# Altium PCB DAQ_Board.PcbDoc
Units mm, origin at the board's own origin, x right, y up, seen from the top; angles counter-clockwise.
Board outline 59.94 x 40 mm, 2 copper layers (Top Layer, Bottom Layer); 41 components, 41 nets, 202 pads, 45 vias.
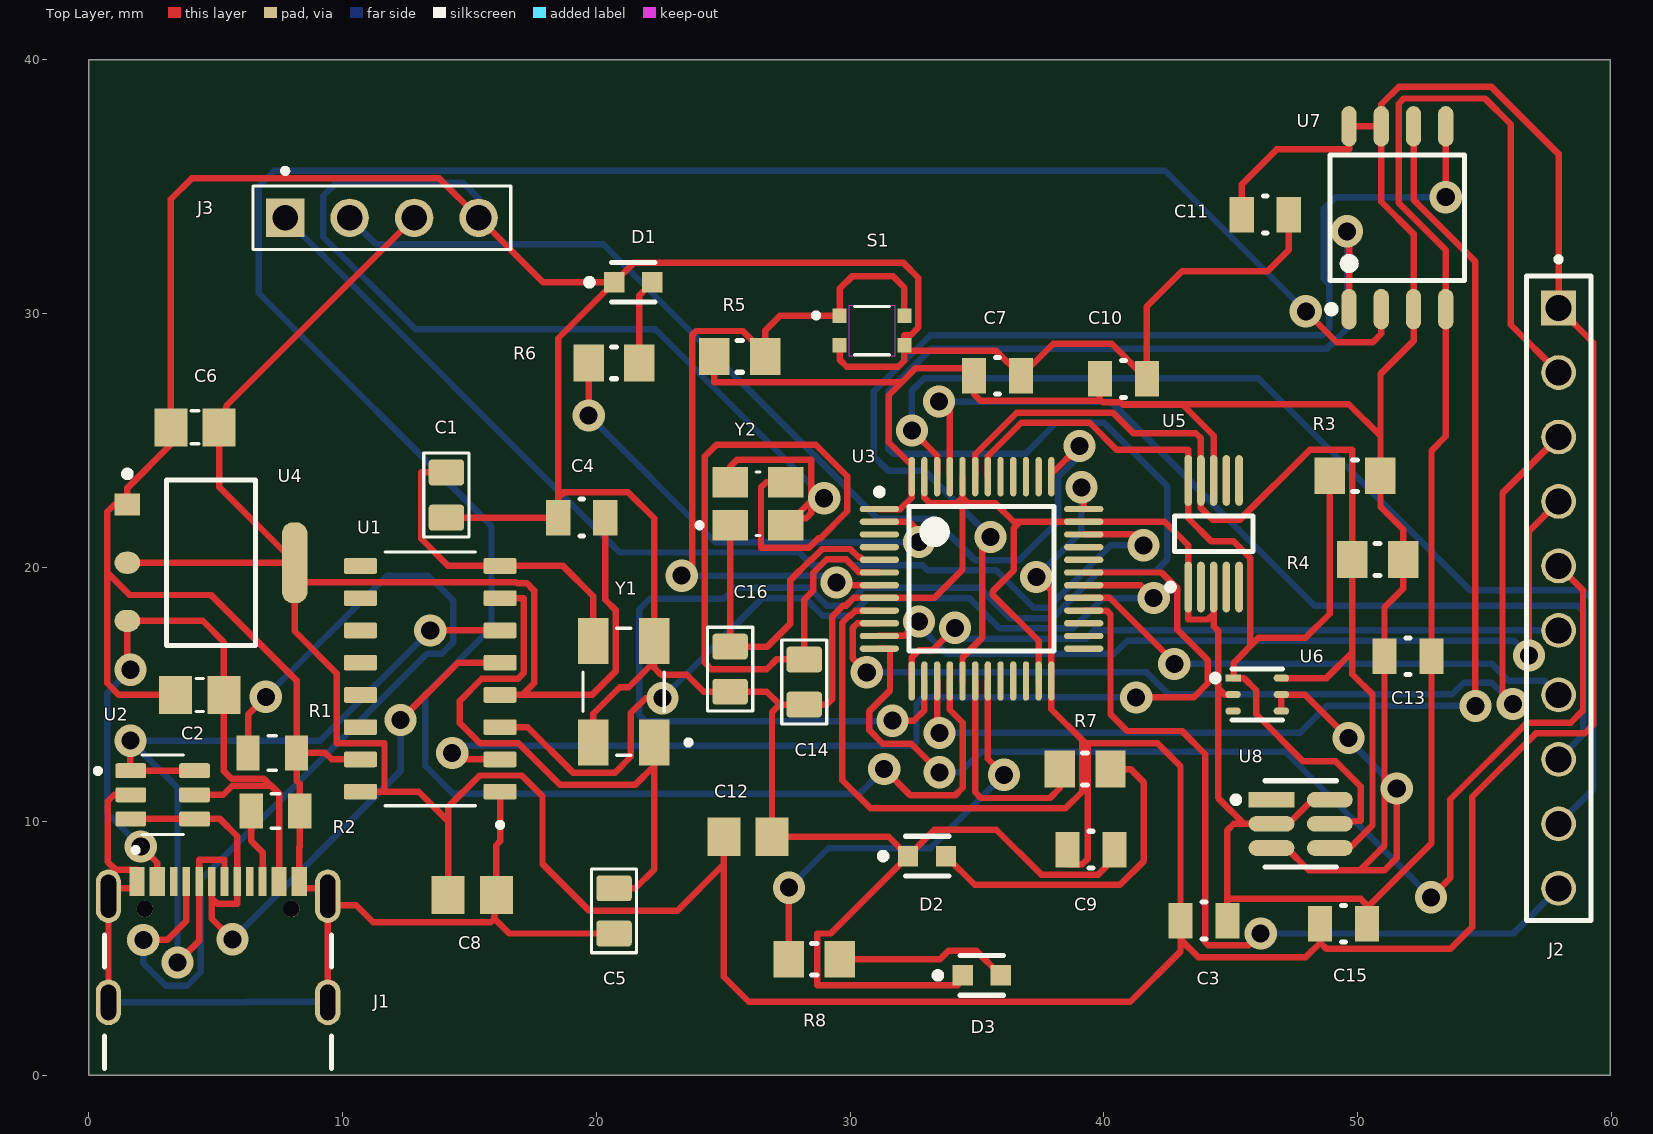
[diagram p0: Top Layer view]
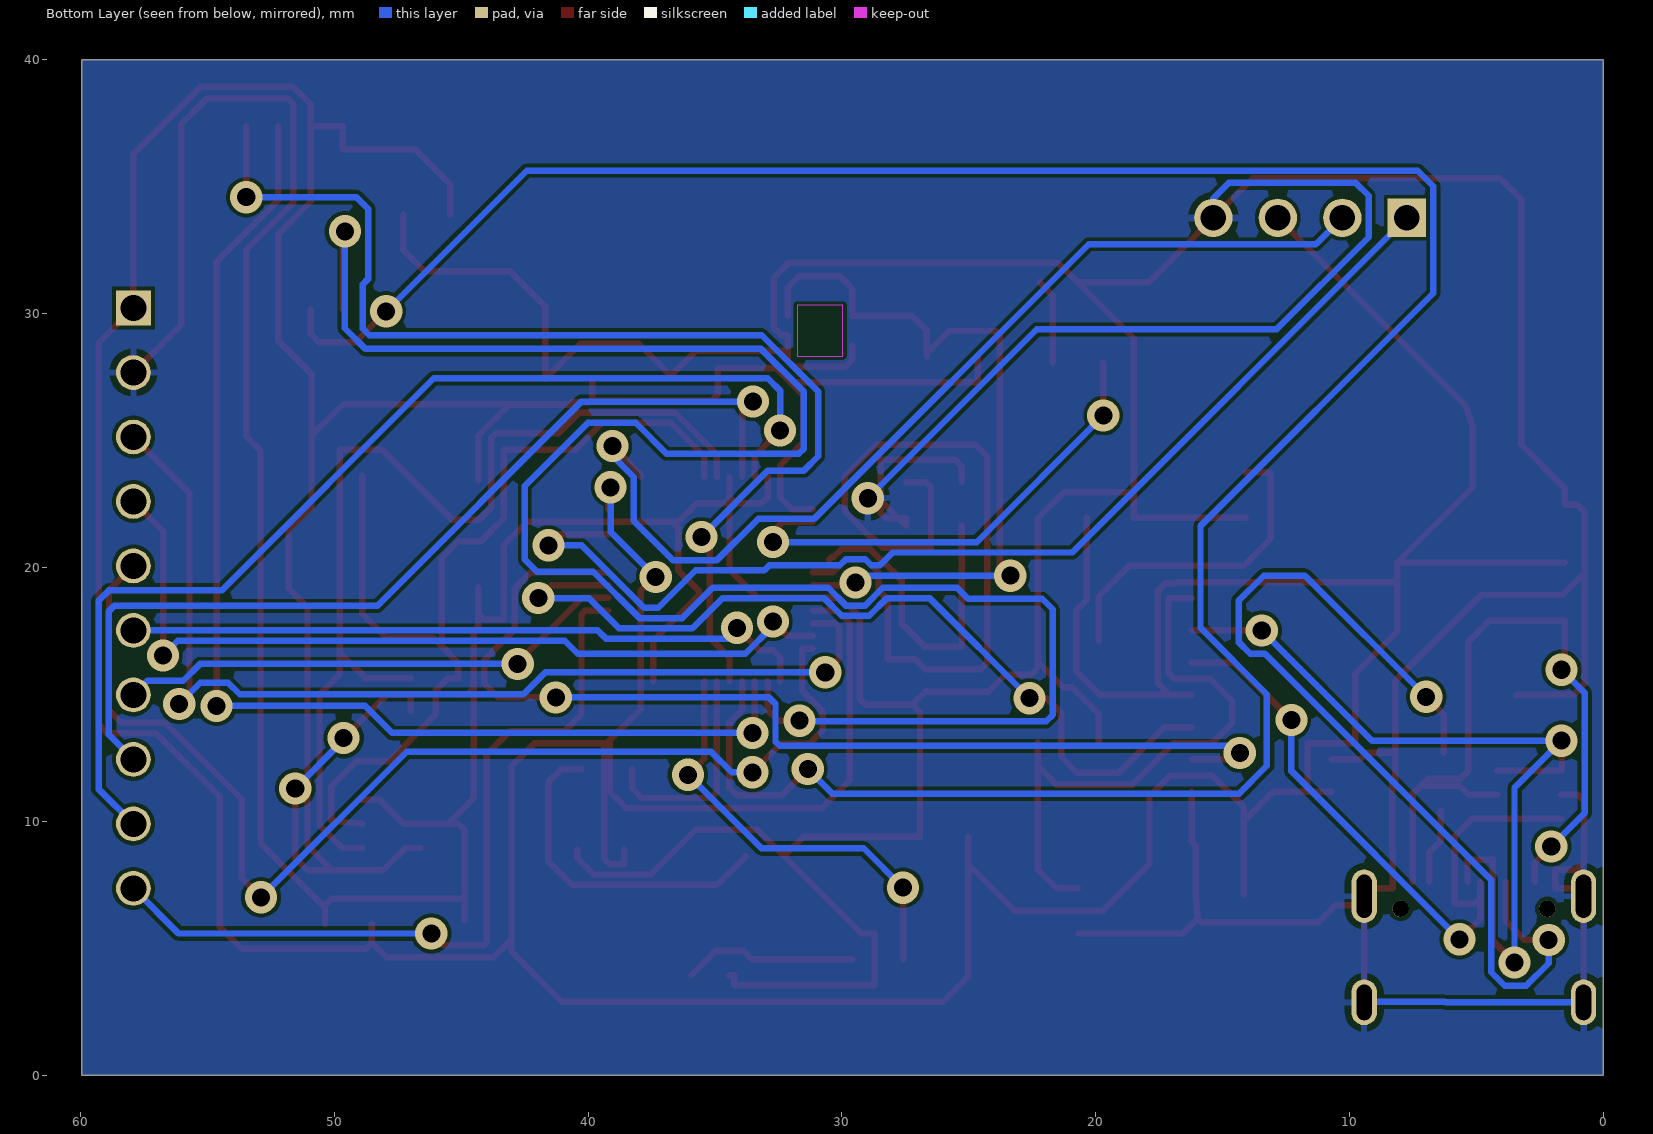
[diagram p1: Bottom Layer view, seen from below]
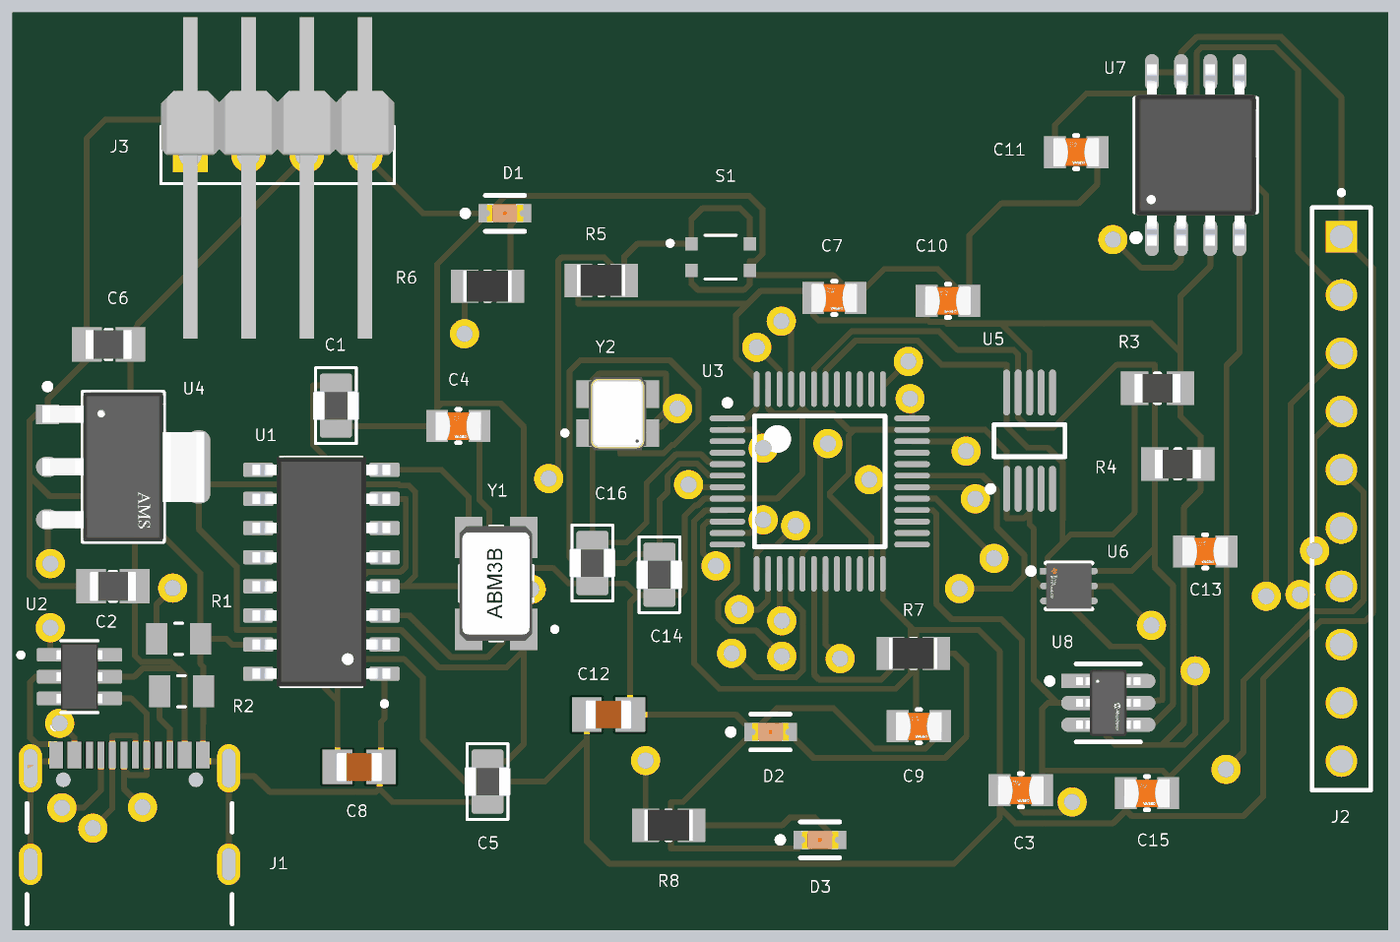
[diagram p2: 3D render of the assembled board from above, using the file's embedded part models]

## Layer stack, top to bottom
Top Solder: solder mask 0.0102, Solder Resist, Dk 3.5
Top Layer: signal copper 0.0356
Dielectric 1: dielectric 0.32, FR-4, Dk 4.8
Bottom Layer: signal copper 0.0356
Bottom Solder: solder mask 0.0102, Solder Resist, Dk 3.5

## Board outline
0,0 59.944,0 59.944,40.005 0,40.005

## Design rules (kind name [scope] priority, off if disabled: settings)
Clearance [All] p1: gap=0.15 ignorepadtopadclearanceinfootprint=TRUE
PolygonConnect [All] p1: connectstyle=Relief reliefconductorwidth=0.254 reliefentries=4 polygonreliefangle="90 Angle" airgapwidth=0.254
RoutingVias [All] p1: holewidth=0.711 width=1.27 viastyle="Through Hole" minholewidth=0.711 minwidth=1.27 maxholewidth=0.711 maxwidth=1.27
SolderMaskExpansion [All] p1: expansion=0 istentingtop=FALSE
SupplyNets "Schematic Supply Nets_2" [InNet('+5')] p1: voltage=0.000
SupplyNets "Schematic Supply Nets_1" [InNet('VCC')] p2: voltage=0.000
SupplyNets "Schematic Supply Nets" [InNet('GND')] p3: voltage=0.000
Width [All] p1: maxlimit=0.254 minlimit=0.254 preferedwidth=0.254
30 further rules are at their usual default settings.

## Components (designator, comment, footprint, x,y, rotation, side; value= is the part's Value field where it differs from the comment)
C1 "CERAMIC-22PF-50V-5%-NPO(0805)" C0805 14.097,22.86 r0 top
C2 "CC0805KKX5R7BB106" CAPC2012X70 4.379,14.986 r0 top
C3 "CC0805KRX7R9BB104" FP-CC0805-0_85-MFG 43.942,6.096 r0 top value="100 nF"
C4 "CC0805KRX7R9BB104" FP-CC0805-0_85-MFG 19.431,21.971 r0 top value="100 nF"
C5 "CERAMIC-22PF-50V-5%-NPO(0805)" C0805 20.701,6.477 r0 top
C6 "CC0805KKX5R7BB106" CAPC2012X70 4.191,25.527 r0 top
C7 "CC0805KRX7R9BB104" FP-CC0805-0_85-MFG 35.814,27.559 r0 top value="100 nF"
C8 "GRM21BR61A105KA01L" CAPC2012X135N 15.113,7.112 r0 top
C9 "CC0805KRX7R9BB104" FP-CC0805-0_85-MFG 39.497,8.89 r0 top value="100 nF"
C10 "CC0805KRX7R9BB104" FP-CC0805-0_85-MFG 40.767,27.432 r0 top value="100 nF"
C11 "CC0805KRX7R9BB104" FP-CC0805-0_85-MFG 46.355,33.909 r0 top value="100 nF"
C12 "GRM21BR61A105KA01L" CAPC2012X135N 25.974,9.398 r0 top
C13 "CC0805KRX7R9BB104" FP-CC0805-0_85-MFG 51.979,16.51 r0 top value="100 nF"
C14 "CERAMIC-22PF-50V-5%-NPO(0805)" C0805 28.194,15.494 r0 top
C15 "CC0805KRX7R9BB104" FP-CC0805-0_85-MFG 49.439,5.969 r0 top value="100 nF"
C16 "CERAMIC-22PF-50V-5%-NPO(0805)" C0805 25.273,16.002 r0 top
D1 "LTST-C191KRKT" FP-LTST-C191KRKT-MFG 21.463,31.242 r0 top
D2 "LTST-C191KRKT" FP-LTST-C191KRKT-MFG 33.032,8.636 r0 top
D3 "LTST-C191KRKT" FP-LTST-C191KRKT-MFG 35.191,3.937 r0 top
J1 "USB4105-GF-A" GCT_USB4105-GF-A 5.105,2.875 r0 top
J2 "MTSW-110-13-T-S-1000" SAMTEC_MTSW-110-13-T-S-1000 57.912,18.796 r90 top
J3 "826648-4" TE_826648-4 11.557,33.782 r0 top
R1 "RC0805FR-075K1L" RESC2012X60N 7.239,12.7 r0 top
R2 "RC0805FR-075K1L" RESC2012X60N 7.366,10.414 r0 top
R3 "RC0805FR-074K7L" YAGO-RC0805_M 49.895,23.622 r0 top
R4 "RC0805FR-074K7L" YAGO-RC0805_M 50.784,20.32 r0 top
R5 "RC0805FR-07100RL" RESC2013X60X35ML10T20 25.654,28.321 r0 top
R6 "RC0805FR-071KL" RESC2013X60X35ML10T20 20.701,28.067 r0 top
R7 "RC0805FR-071KL" RESC2013X60X35ML10T20 39.259,12.065 r0 top
R8 "RC0805FR-071KL" RESC2013X60X35ML10T20 28.591,4.572 r0 top
S1 "USLPT2819DT2TR" SW_USLPT2819DT2TR 30.861,29.337 r0 top
U1 "CH340G" SOIC127P600X180-16N 13.462,15.621 r180 top
U2 "USBLC6-2SC6" SOT95P280X145-6N 2.921,11.049 r0 top
U3 "STM32F103C8T6" STM-LQFP48_L 35.179,19.558 r0 top
U4 "AMS1117-3.3" FP-AMS1117-IPC_C 4.826,20.193 r0 top
U5 "ADS1115IDGST" TI-DGS10_M 44.323,21.336 r90 top
U6 "TMP117MAIDRVR" FP-DRV0006B-IPC_C 46.039,15.001 r0 top
U7 "W25Q32JVSSIQ" SOIC127P790X216-8N 51.562,33.782 r90 top
U8 "MCP4725A0T-E/CH" FP-C04-028-CHY-IPC_A 47.752,9.906 r0 top
Y1 "ABM3B-12.000MHZ-B2-T" XTAL_ABM3B-12.000MHZ-B2-T 21.082,15.113 r180 top
Y2 "C3E-8.000-18-3030-X-R" XTAL_C3E-8.000-18-3030-X-R 26.373,22.518 r0 top

## Footprints (in the part's own frame and the unit in brackets; to place one, negate y for a bottom-side part, rotate by r counter-clockwise, add the part's x,y. Pads: shape width x height; smd on the part's side, far side on the other; paste and mask are expansions set on the pad)
C0805 [mil]
  rrect25% 55x40 smd: 1(0,35) 2(0,-35)
  silkscreen extent -35,-65 35,65, body extent -39,-25 39,25, height 28
CAPC2012X70 [mm]
  rect 1.3x1.5 smd: 1(-0.95,0) 2(0.95,0)
  silkscreen extent -0.15,-0.65 0.15,0.65, body extent -1,-0.63 1,0.63, height 0.3
CAPC2012X135N [mm]
  rect 1.3x1.5 smd paste+0 mask+0.102: 1(-0.95,0) 2(0.95,0)
  body extent -1,-0.63 1,0.63, height 1.35
FP-AMS1117-IPC_C [mm]
  rect 1.004x0.872 smd paste+0 mask+0: 1(-3.295,2.29)
  rrect100% 1.004x0.872 smd paste+0 mask+0: 2(-3.295,0) 3(-3.295,-2.29)
  rrect87% 1.004x3.182 smd paste+0 mask+0: 4(3.295,0)
  silkscreen extent -3.42,-3.25 1.75,3.62, body extent -3.9,-3.35 3.9,3.35, height 0.25
FP-C04-028-CHY-IPC_A [mm]
  rect 1.805x0.618 smd paste+0 mask+0: 1(-1.15,0.95)
  rrect100% 1.805x0.618 smd paste+0 mask+0: 2(-1.15,0) 3(-1.15,-0.95) 4(1.15,-0.95) 5(1.15,0) 6(1.15,0.95)
  silkscreen extent -2.68,-1.7 1.4,1.7, body extent -2.55,-1.95 2.55,1.95, height 0.25
FP-CC0805-0_85-MFG [mm]
  rect 0.95x1.4 smd paste+0 mask+0: 1(-0.925,0) 2(0.925,0)
  silkscreen extent -0.07,-0.73 0.07,0.73, body extent -1.6,-1.05 1.6,1.05, height 0.25
FP-DRV0006B-IPC_C [mm]
  rect 0.611x0.292 smd paste+0 mask+0: 1(-0.951,0.65)
  rrect100% 0.611x0.292 smd paste+0 mask+0: 2(-0.951,0) 3(-0.951,-0.65) 4(0.951,-0.65) 5(0.951,0) 6(0.951,0.65)
  silkscreen extent -1.78,-1 1,1, body extent -1.36,-1.1 1.36,1.1, height 0.25
FP-LTST-C191KRKT-MFG [mm]
  rect 0.8x0.8 smd paste+0 mask+0: 1(-0.75,0) 2(0.75,0)
  silkscreen extent -1.86,-0.78 0.86,0.78, body extent -1.25,-0.55 1.25,0.55, height 0.25
GCT_USB4105-GF-A [mm]
  rect 0.6x1.15 smd mask+0.05: A1_B12(-3.2,4.755) A4_B9(-2.4,4.755) B1_A12(3.2,4.755) B4_A9(2.4,4.755)
  rect 0.3x1.15 smd mask+0.05: A5(-1.25,4.755) A6(-0.25,4.755) A7(0.25,4.755) A8(1.25,4.755) B5(1.75,4.755) B6(0.75,4.755) B7(-0.75,4.755) B8(-1.75,4.755)
  oval 1x2.1 hole 0.6 slot 1.7 at 90 deg: SH1(-4.32,4.18) SH2(4.32,4.18)
  oval 1x1.8 hole 0.6 slot 1.4 at 90 deg: SH3(-4.32,0) SH4(4.32,0)
  round 0.65 hole 0.65 unplated: ""(-2.89,3.68) ""(2.89,3.68)
  silkscreen extent -4.47,-2.6 4.47,6.1
RESC2012X60N [mm]
  rect 0.92x1.38 smd: 1(-0.955,0) 2(0.955,0)
  silkscreen extent -0.17,-0.68 0.17,0.68
RESC2013X60X35ML10T20 [mm] "Chip Resistor, 2-Leads, Body 2.1x1.35mm, IPC Low Density"
  rect 1.2x1.45 smd: 1(-1,0) 2(1,0)
  silkscreen extent -0.1,-0.62 0.1,0.62, body extent -1.05,-0.68 1.05,0.67, height 0.6
SAMTEC_MTSW-110-13-T-S-1000 [mm]
  rect 1.37x1.37 / inner round 1.37 / far side rect 1.37x1.37 hole 1.02: 01(11.43,0)
  round 1.37 hole 1.02: 02(8.89,0) 03(6.35,0) 04(3.81,0) 05(1.27,0) 06(-1.27,0) 07(-3.81,0) 08(-6.35,0) 09(-8.89,0) 10(-11.43,0)
  silkscreen extent -12.7,-1.27 13.45,1.27
SOIC127P600X180-16N [mm]
  rrect25% 1.31x0.62 smd: 1(-2.75,4.445) 2(-2.75,3.175) 3(-2.75,1.905) 4(-2.75,0.635) 5(-2.75,-0.635) 6(-2.75,-1.905) 7(-2.75,-3.175) 8(-2.75,-4.445) 9(2.75,-4.445) 10(2.75,-3.175) 11(2.75,-1.905) 12(2.75,-0.635) 13(2.75,0.635) 14(2.75,1.905) 15(2.75,3.175) 16(2.75,4.445)
  silkscreen extent -2.85,-5 1.78,5.85, body extent -3,-5 3,5, height 1.8
SOIC127P790X216-8N [mm]
  oval 1.6x0.6 smd: 1(-3.6,1.905) 2(-3.6,0.635) 3(-3.6,-0.635) 4(-3.6,-1.905) 5(3.6,-1.905) 6(3.6,-0.635) 7(3.6,0.635) 8(3.6,1.905)
  silkscreen extent -3.82,-2.65 2.47,2.82, body extent -3.95,-2.64 3.95,2.64, height 2.16
SOT95P280X145-6N [mm]
  rrect25% 1.21x0.59 smd: 1(-1.255,0.95) 2(-1.255,0) 3(-1.255,-0.95) 4(1.255,-0.95) 5(1.255,0) 6(1.255,0.95)
  silkscreen extent -2.65,-1.56 0.81,1.56, body extent -1.4,-1.46 1.4,1.46, height 0.4
STM-LQFP48_L [mm] "QFP, 48-Leads, Body 7x7mm, Pitch 0.5mm, IPC High Density"
  oval 1.55x0.25 smd: 1(-4.025,2.75) 2(-4.025,2.25) 3(-4.025,1.75) 4(-4.025,1.25) 5(-4.025,0.75) 6(-4.025,0.25) 7(-4.025,-0.25) 8(-4.025,-0.75) 9(-4.025,-1.25) 10(-4.025,-1.75) 11(-4.025,-2.25) 12(-4.025,-2.75) 25(4.025,-2.75) 26(4.025,-2.25) 27(4.025,-1.75) 28(4.025,-1.25) 29(4.025,-0.75) 30(4.025,-0.25) 31(4.025,0.25) 32(4.025,0.75) 33(4.025,1.25) 34(4.025,1.75) 35(4.025,2.25) 36(4.025,2.75)
  oval 0.25x1.55 smd: 13(-2.75,-4.025) 14(-2.25,-4.025) 15(-1.75,-4.025) 16(-1.25,-4.025) 17(-0.75,-4.025) 18(-0.25,-4.025) 19(0.25,-4.025) 20(0.75,-4.025) 21(1.25,-4.025) 22(1.75,-4.025) 23(2.25,-4.025) 24(2.75,-4.025) 37(2.75,4.025) 38(2.25,4.025) 39(1.75,4.025) 40(1.25,4.025) 41(0.75,4.025) 42(0.25,4.025) 43(-0.25,4.025) 44(-0.75,4.025) 45(-1.25,4.025) 46(-1.75,4.025) 47(-2.25,4.025) 48(-2.75,4.025)
  silkscreen extent -4.15,-2.85 2.85,3.55, body extent -3.5,-3.5 3.5,3.5, height 1.6
SW_USLPT2819DT2TR [mm]
  rect 0.55x0.57 smd: 1(-1.275,0.58) 2(1.275,0.58) 3(-1.275,-0.58) 4(1.275,-0.58)
  Keep-Out Layer region: 0.9,-1 -0.9,-1 -0.9,1 0.9,1
  silkscreen extent -2.3,-0.95 0.68,0.95
TE_826648-4 [mm]
  rect 1.508x1.508 hole 1: 1(-3.81,0)
  round 1.508 hole 1: 2(-1.27,0) 3(1.27,0) 4(3.81,0)
  silkscreen extent -5.08,-1.25 5.08,1.95, body extent -5.08,-8 5.08,6, height 1.25
TI-DGS10_M [mm] "SOP, 10-Leads, Body 3x3mm, Pitch 0.5mm, IPC Low Density"
  oval 2x0.3 smd: 1(-2.1,1) 2(-2.1,0.5) 3(-2.1,0) 4(-2.1,-0.5) 5(-2.1,-1) 6(2.1,-1) 7(2.1,-0.5) 8(2.1,0) 9(2.1,0.5) 10(2.1,1)
  silkscreen extent -2.22,-1.55 0.7,1.82, body extent -1.55,-1.55 1.55,1.55, height 1.1
XTAL_ABM3B-12.000MHZ-B2-T [mm]
  rect 1.2x1.8 smd: 1(-1.2,2) 2(-1.2,-2) 3(1.2,-2) 4(1.2,2)
  silkscreen extent -2.65,-2.5 1.6,2.5, body extent -1.58,-2.5 1.6,2.5, height 1.1
XTAL_C3E-8.000-18-3030-X-R [mm]
  rect 1.4x1.2 smd: 1(-1.1,-0.85) 2(1.1,-0.85) 3(1.1,0.85) 4(-1.1,0.85)
  silkscreen extent -2.4,-1.25 0.08,1.25, body extent -1.6,-1.25 1.6,1.25, height 0.75
YAGO-RC0805_M [mm] "Chip Resistor, 2-Leads, Body 2.00x1.25mm, IPC Low Density"
  rect 1.2x1.45 smd: 1(-1,0) 2(1,0)
  silkscreen extent -0.1,-0.62 0.1,0.62, body extent -1,-0.62 1,0.63, height 0.6

## Part data
C1 C5 C14 C16: "22 pF Â±5% 50V Ceramic Capacitor C0G, NP0 0805 (2012 Metric)", Package="0805 Yageo", Check_prices=https://www.snapeda.com/parts/CC0805JRNPO9BN220/Yageo/view-part/?ref=eda, MF=Yageo, MP=CC0805JRNPO9BN220, SnapEDA_Link=https://www.snapeda.com/parts/CC0805JRNPO9BN220/Yageo/view-part/?ref=snap
C2 C6: "10 ÂµF Â±10% 16V Ceramic Capacitor X5R 0805 (2012 Metric)", Package="0805 Yageo", Check_prices=https://www.snapeda.com/parts/CC0805KKX5R7BB106/Yageo/view-part/?ref=eda, MF=Yageo, MP=CC0805KKX5R7BB106, SnapEDA_Link=https://www.snapeda.com/parts/CC0805KKX5R7BB106/Yageo/view-part/?ref=snap
C3 C4 C7 C9 C10 C11 C13 C15: library part CMP-2100-03606-3, "CAP CER 0.1UF 50V X7R 0805", Capacitance="100 nF", Manufacturer=Yageo, Package=CC0805-0.85, Temperature="-30°C to +85°C", Temperature Characteristic=X7R, Temperature Range High=+85°C, Temperature Range Low=-30°C, Tolerance=0.1, Voltage Rating="50 V", Automotive=No, Category=Cap, ComponentLink2Description=Datasheet, ComponentLink2URL=http://www.yageo.com/documents/recent/UPY-GPHC_Y5V_6.3V-to-50V_8.pdf, Device Class L1="Passive Components", Device Class L2=Capacitors, Device Class L3="Ceramic Capacitors", Digikey Description="CAP CER 0.1UF 50V X7R 0805", Footprint Url=http://www.yageo.com/exep/pages/download/literatures/UPY-C_GEN_24.pdf, Height=0.95mm, Ipc Land Pattern Name=CAPC200125X85, Lead Free=Yes, Manufacturer Part Number=CC0805KRX7R9BB104, Material=Ceramic, Mouser Description="Multilayer Ceramic Capacitors MLCC - SMD/SMT 100nF 50V X7R 10%", Octopart=https://octopart.com/cc0805krx7r9bb104-yageo-192993, RoHS=TRUE
C8 C12: "SMD Capacitor X5R(EIA) with Capacitance: 1.0uF Tol. 10%. Rated Voltage: 10Vdc", Package="805-2 Murata", Check_prices=https://www.snapeda.com/parts/GRM21BR61A105KA01L/Murata/view-part/?ref=eda, MF=Murata, MP=GRM21BR61A105KA01L, SnapEDA_Link=https://www.snapeda.com/parts/GRM21BR61A105KA01L/Murata/view-part/?ref=snap
D1 D2 D3: library part CMP-2000-05199-2, Case Code (Imperial)=0603, Case Code (Metric)=1608, Color=Red, Current=2A, Forward Current=20mA, Forward Voltage=2V, Lens Color=Colorless, Max Operating Temperature=85°C, Min Operating Temperature=-55°C, Power Dissipation=75mW, Reverse Voltage=5V, Case/Package=0603, Depth=800µm, Dominant Wavelength=631nm, Height=550µm, Illumination Color=Red, Lead Free="Lead Free", Length=1.6mm, Lens Style=Clear, Lens Transparency=Clear, Luminous Intensity=54mcd, Mount="Surface Mount", NexarPartId=549908, Number of Elements=1, Number of LEDs=1, Number of Pins=2, Packaging="Tape and Reel", Power Rating=75mW, Radiation Hardening=No, RoHS=Compliant, Schedule B="8541402000, 8541402000", Test Current=20mA, Viewing Angle=130°, Voltage=2V, Wavelength=639nm, Width=800µm
J1 J2 R1 R2: Package=None, Availability=Unavailable, Price=None
  J1: MF="{'manufacturer': u'GCT'}", MP=USB4105-GF-A
  J2: MP=MTSW-110-13-T-S-1000
  R1 R2: MF="{'manufacturer': u'YAGEO'}", MP=RC0805FR-075K1L
J3: "Connector Header Through Hole 4 position 0.100 (2.54mm)", Package=None, Availability=Warning, Check_prices=https://www.snapeda.com/parts/826648-4/TE%20Connectivity%20AMP%20Connectors/view-part/2390536/?ref=eda, EU_RoHS_Compliance=Compliant, MF="TE Connectivity", MP=826648-4, Price=None, SnapEDA_Link=https://www.snapeda.com/parts/826648-4/TE%20Connectivity%20AMP%20Connectors/view-part/2390536/?ref=snap
R3 R4: library part CMP-1568-00001-1, "General Puprose Chip Resistor, 4700 Ohm +/- 1%, 0.125 W, -55 to 155 degC, 2-Pin SMD, RoHS, Tape and Reel", Power="0.125 W", Resistance="4700 Ohm", Temperature Max="155 degC", Temperature Min="-55 degC", Tolerance="+/- 1%", ComponentLink1Description="Manufacturer URL", ComponentLink1URL=http://www.yageo.com/NewPortal/_en/index.jsp, ComponentLink2Description=Datasheet, ComponentLink2URL=http://www.yageo.com/documents/recent/PYu-RC_Group_51_RoHS_L-3.pdf, DatasheetVersion="Rev. 3", Mounting Technology="Surface Mount", PackageDescription="2-Pin Surface Mount Device, Body 2 x 1.25 mm", Packing="Tape and Reel", PartNumber=RC0805FR-074K7L, RoHS=TRUE
R5: library part CMP-2100-03669-1, "Chip Resistor, 100 Ohm, +/-1%, 0.125 W, -55 to 155 degC, 0805 (2012 Metric), RoHS, Tape and Reel", Case Code (Imperial)=0805, Case Code (Metric)=2012, Manufacturer=Yageo, Max Operating Temperature=155degC, Max Power Dissipation=125mW, Min Operating Temperature=-55degC, Package Description="2-Pin Surface Mounted Device, Body 2 x 1.25 mm", Package Quantity=1, Resistance=100Ohm, Temperature Coefficient=100ppm/degreesC, Tolerance=1%, Voltage Rating=150V, Case/Package=0805, Composition=ThickFilm, Datasheet URL=http://www.yageo.com/NewPortal/yageodocoutput?fileName=/pdf/R-Chip/PYu-RC_Group_51_RoHS_L_5.pdf, Datasheet Version="Rev. 5, 10/2016", Depth=1.25mm, Height=0.024inch, Lead Free=LeadFree, Lead Pitch=0.4mm, Length=2mm, Manufacturer URL=http://www.yageo.com/, Military Standard=Not, Number of Pins=2, Number of Terminations=2, Package Reference=0805, Packaging=TapeandReel, Power Rating=125mW, REACH SVHC=Unknown, RoHSCompliant=true, Termination=SMD/SMT, Voltage Rating (DC)=150V, Width=0.049inch
R6 R7 R8: library part CMP-2100-03671-1, "Chip Resistor, 1 KOhm, +/- 1%, 125 mW, -55 to 155 degC, 0805 (2012 Metric), RoHS, Tape and Reel", Case Code (Imperial)=0805, Case Code (Metric)=2012, Manufacturer=Yageo, Max Operating Temperature=155degC, Max Power Dissipation=125mW, Min Operating Temperature=-55degC, Package Description="2-Pin Surface Mounted Device, Body 2 x 1.25 mm", Package Quantity=1, Resistance=1KOhm, Temperature Coefficient=100ppm/degreesC, Tolerance=1%, Voltage Rating=150V, Case/Package=0805, Composition=ThickFilm, Datasheet URL=http://www.yageo.com/NewPortal/yageodocoutput?fileName=/pdf/R-Chip/PYu-RC_Group_51_RoHS_L_5.pdf, Datasheet Version="Rev. 5, 10/2016", Depth=1.25mm, Height=0.024inch, Lead Free=LeadFree, Length=0.079inch, Manufacturer URL=http://www.yageo.com/, Military Standard=Not, Number of Pins=2, Number of Terminations=2, Package Reference=0805, Packaging=TapeandReel, Power Rating=125mW, REACH SVHC=Unknown, RoHSCompliant=true, Termination=SMD/SMT, Voltage Rating (DC)=150V, Width=0.049inch
S1: "TACT ULTRA TB 2.8X1.9X0.6 160GF", Package=None, Availability=Unavailable, MP=USLPT2819DT2TR, Price=None
U1: "USB Interface Integrated Circuit", Package=None, Availability="Not in stock", Check_prices=https://www.snapeda.com/parts/Ch340G/WCH/view-part/?ref=eda, MF=WCH, MP=Ch340G, Price=None, SnapEDA_Link=https://www.snapeda.com/parts/Ch340G/WCH/view-part/?ref=snap
U2: "17V Clamp 5A (8/20Âµs) Ipp Tvs Diode Surface Mount SOT-23-6", Package="SOT-23-6 STMicroelectronics", Availability="In Stock", Check_prices=https://www.snapeda.com/parts/USBLC6-2SC6/STMicroelectronics/view-part/?ref=eda, MF=STMicroelectronics, MP=USBLC6-2SC6, Price=None, Purchase-URL=https://pricing.snapeda.com/search/part/USBLC6-2SC6/?ref=eda, SnapEDA_Link=https://www.snapeda.com/parts/USBLC6-2SC6/STMicroelectronics/view-part/?ref=snap
U3: library part CMP-0237-00215-3, "ARM Cortex-M3 32-bit MCU, 64 KB Flash, 20 KB Internal RAM, 37 I/Os, 48-pin LQFP, -40 to 85 degC, Tray", I/Os (High Current)=37, Operating Frequency(F) (Processor speed) (MHz)=72, Supply Voltage(Vcc) min (V)=2, A/D Converter="2x12-bit (10 Channel)", ComponentLink1Description="Manufacturer URL", ComponentLink1URL=http://www.st.com/web/en/home.html, ComponentLink2Description=Datasheet, ComponentLink2URL=http://www.st.com/st-web-ui/static/active/en/resource/technical/document/datasheet/CD00161566.pdf, ComponentLink3Description="Package Specification", ComponentLink3URL=http://www.st.com/st-web-ui/static/active/en/resource/technical/document/datasheet/DM00058181.pdf, Core="ARM Cortex-M3", DatasheetVersion="Rev. 16", FLASH Size (Prog) (kB)=64, Internal RAM Size (kB)=20, Mounting Technology="Surface Mount", PackageDescription="48-Pin Low Profile Quad Flat Package, 7 x 7 mm Body, 0.5 mm Pitch", PackageReference=LQFP48, PackageVersion="Rev. 6, 06/2013", Packing=Tray, PartNumber=STM32F103C8T6
U4: library part CMP-209535-000001-1, "LDO Voltage Regulators 1A, 3.3V", Dropout Voltage=1.1V, Manufacturer="Advanced Monolithic Systems", Max Junction Temp=+125°C, Max Power Dissipation=1.2W, Max Supply Voltage=15V, Nominal Supply Current=5mA, Output Current=1A, Output Voltage=3.3V, Package=AMS1117, Temperature="-40°C to +125°C", Temperature Range Low=-40°C, Automotive=No, Category=IC, ComponentLink2Description=Datasheet, ComponentLink2URL=http://www.advanced-monolithic.com/pdf/ds1117.pdf, Device Class L1="Integrated Circuits (ICs)", Device Class L2="Power Management ICs", Device Class L3="Voltage Regulators - Linear", Height=1.8mm, Ipc Land Pattern Name=SOT229P700X180-4, Lead Free=Yes, Manufacturer Part Number=AMS1117-3.3, Number Of Outputs=1, Octopart=https://octopart.com/ams1117-3.3-advanced+monolithic+systems-25899300, Output Type=Fixed, RoHS=TRUE, Standoff Height=0.64mm, Temperature Range High=+125°C
U5: library part CMP-0003-00378-2, "16-Bit ADC with Integrated Multiplexer, PGA, Comparator, Oscillator, and Reference, -40 to 125 degC, 10-pin SOP (DGS10), Green (RoHS & no Sb/Br)", Analog Voltage AV/DD(Max)(V)=5.5, Analog Voltage AV/DD(Min)(V)=2, Manufacturer="Texas Instruments", # Input Channels=4, Architecture=Delta-Sigma, Code_JEDEC=MO-153, ComponentLink1Description="Manufacturer URL", ComponentLink1URL=http://www.ti.com/, ComponentLink2Description=Datasheet, ComponentLink2URL=http://www.ti.com/general/docs/lit/getliterature.tsp?genericPartNumber=ADS1115&fileType=pdf, ComponentLink3Description="Package Specification", ComponentLink3URL=http://www.ti.com/lit/ml/mpds035b/mpds035b.pdf, DatasheetVersion=SBAS444B, Digital Supply(Max)(V)=5.5, Digital Supply(Min)(V)=2, Eco-Plan="Green (RoHS & no Sb/Br)", INL(Max)(+/-LSB)=1, Interface="Serial I2C", Mounting Technology="Surface Mount", PackageDescription="10-Pin Plastic Small Outline, Body 3 x 3 mm, Pitch 0.5 mm", PackageReference=DGS10, PackageVersion="4073272/C, 02/2004", PartNumber=ADS1115IDGST, Resolution(Bits)=16, Sample Rate (max)(SPS)=860, SubFamily="Precision ADC (<=10MSPS)"
U6: library part CMP-04948-000036-1, "TEMPERATURE SENSOR", Max Operating Temperature=150°C, Min Operating Temperature=-55°C, Mount="Surface Mount", Output Type=I2C, Packaging="Cut Tape", Resolution=16b, RoHS Compliant=Yes
U7: "FLASH - NOR Memory IC 32Mb (4M x 8) SPI - Quad I/O 133 MHz 8-SOIC", Package="SOIC-8 Winbond", Check_prices=https://www.snapeda.com/parts/W25Q32JVSSIQ/Winbond+Electronics/view-part/?ref=eda, MF=Winbond, MP=W25Q32JVSSIQ, SnapEDA_Link=https://www.snapeda.com/parts/W25Q32JVSSIQ/Winbond+Electronics/view-part/?ref=snap
U8: library part CMP-0188-00760-3, "IC DAC 12BIT V-OUT SOT23-6", Case/Package=SOT-23-6, Input Offset Voltage (Vos)=1.1mV, Max Operating Temperature=125°C, Max Supply Voltage=5.5V, Min Operating Temperature=-40°C, Min Supply Voltage=2.7V, Nominal Supply Current=210uA, Package Quantity=3000, Contact Plating=Tin, Height=1.3mm, Integral Nonlinearity (INL)=14.5LSB, Interface=I2C, Lead Free="Lead Free", Length=3.1mm, Mount="Surface Mount", Number of Bits=12, Number of Channels=1, Number of Converters=1, Number of D/A Converters=1, Number of DAC Channels=1, Number Of Outputs=1, Number of Pins=6, Output Type=Voltage, Packaging="Tape and Reel", Polarity=Unipolar, Radiation Hardening=No, REACH SVHC="No SVHC", Resolution=12b, Settling Time=6us, Supply Type=Single, Termination=SMD/SMT, Width=1.8mm
Y1: "12 MHz Â±20ppm Crystal 18pF 70 Ohms 4-SMD, No Lead", Package="SMD-4 Abracon LLC", Check_prices=https://www.snapeda.com/parts/ABM3B-12.000MHZ-B2-T/Abracon/view-part/?ref=eda, MF=Abracon, MP=ABM3B-12.000MHZ-B2-T, SnapEDA_Link=https://www.snapeda.com/parts/ABM3B-12.000MHZ-B2-T/Abracon/view-part/?ref=snap
Y2: "Crystal, 3.20mm x2.50mm,8MHz,18pF,-40-85C", Package="SMD-4 Aker", Check_prices=https://www.snapeda.com/parts/C3E-8.000-18-3030-X-R/Aker/view-part/?ref=eda, MF="Aker Technology USA", MP=C3E-8.000-18-3030-X-R, SnapEDA_Link=https://www.snapeda.com/parts/C3E-8.000-18-3030-X-R/Aker/view-part/?ref=snap

## Via types
v1: diameter 1.27, hole 0.711, Top Layer to Bottom Layer, 45 vias

## Nets (pads, with @x,y where several pads share a name; then routed paths per layer and width w, separated by ;. In a path a pad name is that pad's centre, name@x,y a point inside that pad or via, vN(x,y) a via of type N, cw(c..) or ccw(c..) an arc to the next point about the centre after c; other vN are vias at no path point)
+5: C2.2 J1.A4_B9 J1.B4_A9 U2.5 U4.3 | length 30.4
  Top Layer w0.254: v1(1.651,15.977) 1.531,16.097 U4.3 4.495,17.903 5.329,17.069 C2.2 5.329,11.989 5.634,11.684 6.909,11.684 7.188,11.405 ; v1(2.057,9.017) 2.705,8.369 J1.A4_B9 ; U2.5 5.309,11.049 5.664,11.405 7.188,11.405 ; J1.B4_A9 7.505,11.087 ; 7.188,11.405 7.505,11.087 ; 7.188,11.405 7.214,11.405 7.505,11.113 7.505,11.087
  Bottom Layer w0.254: v1(1.651,15.977) 0.737,15.062 0.737,10.338 v1(2.057,9.017)
AIN0: U5.4
AIN1: U5.5
AIN2: U5.6
AIN3: U5.7
DAC_OUT: U8.1
FLASH_CS: U3.14 U7.1 | length 83.8
  Top Layer w0.254: v1(31.674,13.97) 32.512,13.97 32.929,14.387 U3.14 ; v1(49.581,33.249) 49.657,33.172 U7.1
  Bottom Layer w0.254: v1(31.674,13.97) 31.648,13.945 21.946,13.945 21.692,14.199 21.692,18.358 22.107,18.773 25.032,18.773 25.463,19.204 28.389,19.204 29.086,18.506 29.842,18.506 30.539,19.204 35.098,19.204 36.288,18.013 37.973,18.013 39.797,19.837 42.012,19.837 42.494,20.32 42.494,23.216 40.007,25.702 38.128,25.702 36.911,24.486 31.699,24.486 31.496,24.689 31.496,26.924 33.188,28.616 48.768,28.616 49.581,29.429 v1(49.581,33.249)
GND: C1.2 C2.1 C3.2 C4.1 C5.2 C6.1 C7.2 C8.2 C9.2 C10.2 C11.2 C12.2 C13.2 C14.2 C15.2 C16.2 D1.1 D2.1 D3.1 J1.A1_B12 J1.B1_A12 J1.SH1 J1.SH2 J1.SH3 J1.SH4 J2.02 J3.4 R1.2 R2.2 S1.3 S1.4 U1.1 U1.15 U2.2 U3.8 U3.23 U3.35 U3.44 U3.47 U4.1 U5.1 U5.3 U6.2 U7.4 U8.2 U8.6 Y1.2 Y1.4 Y2.2 Y2.4 | length 370.2
  Top Layer w0.254: J1.SH3 J1.SH1 0.785,7.366 1.905,7.366 J1.A1_B12 1.905,8.107 1.062,8.107 0.762,8.407 0.762,10.795 1.016,11.049 U2.2 ; C2.1 1.194,14.986 0.737,15.443 0.737,19.812 ; J1.SH4 J1.SH2@9.425,6.706 ; U1.15 9.576,12.446 9.322,12.7 R1.2 ; C1.2 C4.1 18.506,22.758 ; U1.1 16.212,9.217 16.063,9.068 C8.2 15.989,6.17 ; Y1.4 19.882,14.246 20.928,15.292 21.28,15.292 Y1.2@22.282,16.294 ; C5.2 16.571,5.588 15.989,6.17 ; Y2.4 25.273,23.978 25.552,24.257 28.473,24.257 v1@28.473,22.633 ; v1(28.981,22.733) 28.573,22.733 v1@28.473,22.633 ; S1.3 29.586,28.199 29.87,27.915 31.902,27.915 32.136,28.148 S1.4@32.136,28.55 ; U3.47 32.929,22.758 33.158,22.53 34.2,22.53 34.429,22.758 ; U3.44 34.429,22.758 ; D3.1 34.239,3.937 34.239,3.556 28.702,3.556 28.702,5.588 29.234,5.588 D2.1 ; U3.23 37.429,17.115 35.613,18.931 35.613,19.057 36.447,19.891 36.447,21.56 36.695,21.808 ; C9.2 40.422,8.553 39.776,7.907 37.533,7.907 35.763,9.677 33.323,9.677 D2.1 ; U5.3 44.323,18.186 ; C3.2 44.867,6.96 ; U6.2 44.765,15.001 44.496,15.27 ; C11.2 47.28,32.512 46.442,31.674 43.078,31.674 41.692,30.287 C10.2 40.306,28.818 37.998,28.818 C7.2 35.748,28.55 S1.4@32.136,28.55 ; U8.6 48.219,10.856 47.269,9.906 U8.2 45.517,9.906 ; C15.2 C15.2@50.364,6.604 ; J2.02 56.032,29.566 56.032,37.465 55.016,38.481 51.816,38.481 51.613,38.278 51.613,34.366 53.467,32.512 U7.4 53.467,25.171 52.904,24.608 C13.2 52.904,9.144 C15.2@50.364,6.604 ; 0.737,19.812 0.737,22.204 1.016,22.483 U4.1 1.531,23.139 3.241,24.849 C6.1 3.241,34.508 4.064,35.331 13.818,35.331 J3.4 17.907,31.242 D1.1 ; 0.737,19.812 1.626,18.923 4.826,18.923 8.194,15.555 R1.2 ; R1.2 8.194,11.608 8.321,11.481 R2.2 8.321,9.007 8.305,8.992 J1.B1_A12 8.305,7.366 9.425,7.366 J1.SH2 J1.SH2@9.425,6.706 ; J1.SH2@9.425,6.706 10.541,6.706 11.217,6.03 15.85,6.03 15.989,6.17 ; 18.506,22.758 18.709,22.962 21.266,22.962 22.282,21.946 Y1.2 Y1.2@22.282,16.294 ; 18.506,22.758 18.506,29.035 D1.1 ; D1.1 21.475,32.004 32.106,32.004 32.69,31.42 32.69,29.464 32.385,29.159 32.136,29.159 S1.4 S1.4@32.136,28.55 ; Y1.2@22.282,16.294 22.282,16.053 22.555,15.78 23.571,15.78 24.238,15.113 C16.2 26.721,15.113 27.229,14.605 ; 27.229,14.605 C14.2 29.083,14.605 29.291,14.813 29.291,18.064 29.733,18.506 29.842,18.506 30.143,18.808 33.325,18.808 34.429,19.912 34.429,22.758 ; 27.229,14.605 26.924,14.3 C12.2 31.52,9.398 D2.1 ; Y2.2@27.786,21.946 27.508,21.668 Y2.2 27.473,21.946 Y2.2@27.786,21.946 ; Y2.2@27.786,21.946 v1@28.473,22.633 ; Y2.2@27.786,21.946 28.27,21.946 28.473,22.149 v1@28.473,22.633 ; 34.429,22.758 34.658,22.53 35.727,22.53 36.449,21.808 36.695,21.808 ; 36.695,21.808 U3.35 42.394,21.808 43.323,20.879 U5.1 43.323,17.958 44.094,17.958 44.323,18.186 ; 44.323,18.186 44.323,17.694 44.496,17.521 44.496,17.348 44.496,15.27 ; 44.496,15.27 44.496,10.927 45.517,9.906 ; 44.867,6.96 44.867,9.663 45.11,9.906 45.517,9.906 ; 44.867,6.96 50.11,6.96 50.364,6.706 C15.2@50.364,6.604
  Bottom Layer w0.254: J1.SH3 0.785,2.87 6.223,2.87 6.248,2.896 9.425,2.896 J1.SH4 ; J3.4 15.367,34.544 14.757,35.154 9.754,35.154 9.246,34.646 9.246,33.02 12.878,29.388 22.327,29.388 v1(28.981,22.733)
LED1: R6.1 U3.2 | length 19.3
  Top Layer w0.254: v1(19.701,25.994) R6.1 ; U3.2 32.319,21.808 32.715,21.412 v1(32.715,21.006)
  Bottom Layer w0.254: v1(19.701,25.994) 24.689,21.006 v1(32.715,21.006)
LED2: R7.1 U3.18 | length 8.7
  Top Layer w0.254: U3.18 34.929,11.149 35.154,10.924 37.874,10.924 38.259,11.31 R7.1
LED3: R8.1 U3.19 | length 17.1
  Top Layer w0.254: R8.1 v1(27.591,7.391) ; U3.19 35.429,12.475 v1(36.068,11.836)
  Bottom Layer w0.254: v1(27.591,7.391) 29.14,8.941 33.172,8.941 v1(36.068,11.836)
MISO: U3.16 U7.2 | length 103.1
  Top Layer w0.254: v1(31.344,12.065) 32.383,11.026 34.138,11.026 34.442,11.331 34.442,13.888 33.929,14.402 U3.16 ; v1(47.955,30.099) 49.174,28.88 50.597,28.88 50.927,29.21 U7.2
  Bottom Layer w0.254: v1(31.344,12.065) 30.378,11.1 14.351,11.1 13.259,12.192 13.259,15.011 15.875,17.628 15.875,21.641 6.706,30.81 6.706,35.027 7.315,35.636 42.418,35.636 v1(47.955,30.099)
MOSI: U3.17 U7.5 | length 46.1
  Top Layer w0.254: U3.17 34.429,16.459 35.201,17.231 35.201,20.875 v1(35.535,21.209) ; v1(53.467,34.595) U7.5
  Bottom Layer w0.254: v1(35.535,21.209) 32.918,23.825 31.496,23.825 30.937,24.384 30.937,26.937 33.16,29.159 48.616,29.159 48.87,29.413 48.87,31.166 48.666,31.369 48.666,34.138 49.124,34.595 v1(53.467,34.595)
NetC1_1: C1.1 U1.8 Y1.3 | length 13.1
  Top Layer w0.254: C1.1 13.106,23.749 13.106,21.133 14.173,20.066 U1.8 18.694,20.066 19.882,18.878 Y1.3
NetC5_1: C5.1 U1.7 Y1.1 | length 23.6
  Top Layer w0.254: U1.7 17.145,18.796 17.145,15.85 16.916,15.621 15.494,15.621 14.63,14.757 14.63,13.868 15.418,13.081 16.942,13.081 18.567,11.455 21.545,11.455 22.282,12.192 ; C5.1 21.539,7.366 22.282,8.109 22.282,12.192 ; Y1.1 22.282,12.192
NetC14_1: C14.1 U3.6 Y2.3 | length 34
  Top Layer w0.254: Y2.3 26.695,23.368 26.492,23.165 26.492,20.777 28.378,20.777 28.752,21.151 28.822,21.151 29.893,22.223 29.893,23.599 28.651,24.841 24.74,24.841 24.282,24.384 24.282,16.256 24.536,16.002 26.721,16.002 27.102,16.383 C14.1 28.194,18.741 28.552,19.099 28.552,19.796 29.086,20.33 29.842,20.33 30.362,19.81 31.152,19.81 U3.6
NetC16_1: C16.1 U3.5 Y2.1 | length 12.8
  Top Layer w0.254: Y2.1 C16.1 26.746,16.891 27.635,17.78 27.635,19.495 28.448,20.308 28.48,20.308 28.906,20.734 30.009,20.734 30.338,20.406 30.41,20.406 U3.5@30.506,20.31
NetD1_2: D1.2 R6.2 | length 3.4
  Top Layer w0.254: R6.2 21.701,30.73 D1.2
NetD2_2: D2.2 R7.2 | length 13.3
  Top Layer w0.254: D2.2 34.915,7.503 40.634,7.503 41.578,8.447 41.578,11.533 41.046,12.065 R7.2
NetD3_2: D3.2 R8.2 | length 6.9
  Top Layer w0.254: R8.2 33.542,4.572 33.884,4.914 34.964,4.914 D3.2
NetJ1_A5: J1.A5 R1.1 | length 38.7
  Top Layer w0.254: v1(2.159,5.334) 3.099,5.334 3.855,6.091 J1.A5 ; R1.1 6.284,14.209 v1(6.985,14.91)
  Bottom Layer w0.254: v1(2.159,5.334) 2.159,4.42 3.048,3.531 3.886,3.531 4.42,4.064 4.42,7.696 13.335,16.612 13.919,16.612 14.376,17.069 14.376,18.694 13.386,19.685 11.76,19.685 v1(6.985,14.91)
NetJ1_B5: J1.B5 R2.1 | length 3
  Top Layer w0.254: R2.1 6.411,9.233 6.855,8.788 J1.B5
NetR5_2: R5.2 S1.1 S1.2 U3.7 | length 30.6
  Top Layer w0.254: v1(23.368,19.685) 23.678,19.685 23.777,19.784 23.777,29.161 23.939,29.323 25.777,29.323 26.654,28.446 R5.2 26.654,29.342 27.229,29.917 S1.1 29.586,30.983 30.074,31.471 31.699,31.471 32.136,31.034 S1.2 ; v1(29.464,19.418) 29.572,19.31 U3.7 U3.7
  Bottom Layer w0.254: v1(23.368,19.685) 29.315,19.685 29.464,19.536 v1(29.464,19.418)
PA0: J2.03 U3.10 | length 41.1
  Top Layer w0.254: v1(30.658,15.875) 30.099,16.434 30.099,17.62 30.287,17.808 U3.10 ; v1(56.109,14.63) 55.702,15.037 55.702,22.936 J2.03
  Bottom Layer w0.254: v1(30.658,15.875) 41.681,15.875 42.548,15.008 53.723,15.008 54.182,15.466 55.273,15.466 v1(56.109,14.63)
PA1: J2.04 U3.11 | length 33.5
  Top Layer w0.254: U3.11 32.142,17.308 v1(32.715,17.882) ; v1(56.744,16.535) 56.744,21.438 J2.04
  Bottom Layer w0.254: v1(32.715,17.882) 32.715,17.7 33.803,16.612 40.411,16.612 40.919,17.12 56.159,17.12 v1(56.744,16.535)
PA2: J2.05 U3.12 | length 46.4
  Top Layer w0.254: U3.12 31.572,16.808 31.572,15.161 30.762,14.351 30.762,13.589 31.293,13.058 32.408,13.058 v1(33.528,11.938) ; v1(52.883,7.01) 53.645,7.772 53.645,10.871 56.667,13.894 58.391,13.894 58.874,14.376 58.874,19.104 J2.05
  Bottom Layer w0.254: v1(33.528,11.938) 34.346,11.938 35.156,12.748 47.145,12.748 v1(52.883,7.01)
PA3: J2.06 U3.13 | length 27.2
  Top Layer w0.254: U3.13 32.429,16.459 32.708,16.739 33.242,16.739 v1(34.131,17.628)
  Bottom Layer w0.254: v1(34.131,17.628) 34.553,17.205 39.294,17.205 39.614,17.526 J2.06
PA8: J2.07 U3.29 | length 20.3
  Top Layer w0.254: U3.29 40.234,18.808 42.774,16.268 v1(42.774,16.205)
  Bottom Layer w0.254: v1(42.774,16.205) 55.289,16.205 55.951,15.542 57.356,15.542 J2.07
PB8: J2.08 U3.45 | length 38.2
  Top Layer w0.254: v1(33.503,26.543) 33.929,26.117 U3.45
  Bottom Layer w0.254: v1(33.503,26.543) 40.259,26.543 48.311,18.491 58.674,18.491 58.877,18.288 58.877,13.411 J2.08
PB9: J2.09 U3.46 | length 43.8
  Top Layer w0.254: v1(32.436,25.403) 33.429,24.409 U3.46
  Bottom Layer w0.254: v1(32.436,25.403) 32.436,26.975 32.918,27.457 46.076,27.457 54.432,19.101 58.877,19.101 59.284,18.694 59.284,11.278 J2.09
PB15: J2.10 U3.28 | length 31.7
  Top Layer w0.254: U3.28 40.107,18.308 40.259,18.156 40.259,14.224 40.919,13.564 43.078,13.564 43.993,12.649 43.993,5.241 44.115,5.119 45.708,5.119 v1(46.177,5.588)
  Bottom Layer w0.254: v1(46.177,5.588) 56.134,5.588 J2.10
RX: U1.2 U3.31 | length 41.9
  Top Layer w0.254: v1(14.326,12.7) 14.58,12.446 U1.2 ; U3.31 42.266,19.808 42.896,19.178 42.896,17.554 44.092,16.358 44.092,15.443 43.536,14.887 v1(41.273,14.887)
  Bottom Layer w0.254: v1(14.326,12.7) 14.605,12.979 32.45,12.979 32.616,13.145 32.616,14.63 32.872,14.887 v1(41.273,14.887)
SCK: U3.15 U7.6 | length 47.5
  Top Layer w0.254: U3.15 33.429,13.586 v1(33.528,13.487) ; U7.6 52.197,34.493 54.635,32.055 v1(54.635,14.554)
  Bottom Layer w0.254: v1(33.528,13.487) 47.72,13.487 48.787,14.554 v1(54.635,14.554)
SCL: R3.1 U3.42 U5.10 U6.1 U8.5 | length 40.4
  Top Layer w0.254: U3.42 35.429,24.384 36.747,25.702 39.446,25.702 40.511,24.638 43.323,24.638 U5.10 43.323,21.946 44.237,21.031 45.11,21.031 45.771,20.371 45.758,16.904 45.11,16.231 ; U6.1 U6.1@45.11,15.651 ; R3.1 48.895,18.186 47.955,17.247 46.101,17.247 45.11,16.231 ; U8.5 50.114,10.033 50.114,11.379 49.128,12.365 47.858,12.365 46.003,14.22 46.003,15.164 45.517,15.651 U6.1@45.11,15.651 ; U6.1@45.11,15.651 45.11,16.231
SDA: R4.1 U3.43 U5.9 U6.6 U8.4 | length 41.3
  Top Layer w0.254: U3.43 34.929,24.464 36.571,26.106 40.356,26.106 41.164,25.298 43.62,25.298 43.823,25.095 U5.9 43.823,22.352 44.28,21.895 45.364,21.895 48.108,24.638 49.784,24.638 R4.1 49.784,16.667 ; U6.6 48.768,15.651 49.784,16.667 ; U8.4 49.682,8.956 50.581,9.855 50.581,15.008 49.784,15.805 49.784,16.667
SWCLK: J3.2 U3.37 | length 39.1
  Top Layer w0.254: U3.37 37.929,23.68 v1(39.04,24.79)
  Bottom Layer w0.254: J3.2 11.328,32.741 20.28,32.741 31.102,21.918 33.302,21.918 34.923,20.297 36.661,20.297 38.204,21.84 38.204,23.571 39.04,24.407 v1(39.04,24.79)
SWDIO: J3.1 U3.34 | length 43.9
  Top Layer w0.254: U3.34 41.128,21.308 v1(41.557,20.879)
  Bottom Layer w0.254: J3.1 20.932,20.597 27.996,20.597 28.504,20.089 28.845,20.089 29.086,20.33 29.842,20.33 30.083,20.089 32.856,20.089 33.052,19.893 35.763,19.893 37.239,18.417 37.795,18.417 40.257,20.879 v1(41.557,20.879)
TX: U1.3 U3.30 | length 34.9
  Top Layer w0.254: U1.3 17.297,13.716 19.101,11.913 20.726,11.913 21.361,12.548 21.361,14.275 21.946,14.859 v1(22.606,14.859) ; U3.30 41.453,19.308 v1(41.961,18.8)
  Bottom Layer w0.254: v1(22.606,14.859) 26.547,18.8 28.221,18.8 28.919,18.102 30.009,18.102 30.707,18.8 34.7,18.8 35.89,17.609 38.786,17.609 39.976,18.8 v1(41.961,18.8)
USB_D+: J1.A6 J1.B6 U1.5 U2.3 U2.4 | length 27.1
  Top Layer w0.254: U2.3 U2.4 5.18,10.099 5.855,9.423 J1.B6 5.855,6.756 5.08,6.756 4.855,6.981 ; J1.A6 4.855,6.981 ; v1(5.668,5.359) 4.855,6.172 4.855,6.981 ; v1(12.294,13.995) 14.554,16.256 U1.5
  Bottom Layer w0.254: v1(5.668,5.359) 12.294,11.985 v1(12.294,13.995)
USB_D-: J1.A7 J1.B7 U1.6 U2.1 U2.6 | length 35.8
  Top Layer w0.254: v1(1.651,13.183) 1.651,11.999 U2.1 U2.6 ; v1(3.505,4.445) 4.355,5.295 J1.B7 4.355,8.484 5.355,8.484 J1.A7 ; v1(13.462,17.526) U1.6
  Bottom Layer w0.254: v1(3.505,4.445) 3.505,11.328 v1(1.651,13.183) 9.119,13.183 v1(13.462,17.526)
VCC: C3.1 C4.2 C6.2 C7.1 C8.1 C9.1 C10.1 C11.1 C12.1 C13.1 C15.1 J2.01 J3.3 R3.2 R4.2 R5.1 U1.4 U1.16 U3.1 U3.9 U3.24 U3.36 U3.48 U4.2 U4.4 U5.8 U6.4 U6.5 U7.3 U7.7 U7.8 U8.3 | length 313.1
  Top Layer w0.254: U4.2 U4.4 ; U1.16 11.557,11.176 ; J3.3 5.461,26.416 C6.2 5.141,23.187 8.121,20.207 U4.4 ; C8.1 14.163,10.018 ; U1.4 17.094,14.986 ; C4.2 20.356,18.735 20.777,18.313 20.777,15.926 19.837,14.986 17.094,14.986 ; R5.1 24.654,27.305 32.034,27.305 ; C12.1 25.024,8.311 ; U3.9 31.152,18.306 30.213,18.306 30.009,18.102 29.97,18.102 29.695,17.828 29.695,11.629 30.804,10.52 38.486,10.52 39.141,11.176 39.141,13.208 ; U3.1 31.979,22.308 32.429,22.758 U3.48 32.429,24.028 31.521,24.936 31.521,26.792 32.034,27.305 ; v1(37.338,19.634) 37.396,19.634 37.929,19.101 U3.24 37.929,14.42 39.141,13.208 ; C9.1 38.572,8.311 39.147,8.311 39.149,8.313 39.37,8.534 39.37,12.979 ; v1(39.116,23.165) 39.204,23.077 U3.36 ; C10.1 39.842,26.619 ; U5.8 44.323,25.197 43.104,26.416 40.76,26.416 40.734,26.441 ; C11.1 45.43,35.092 46.812,36.474 49.657,36.474 U7.8 U7.7 ; U8.3 47.193,8.956 48.072,8.077 50.089,8.077 ; U6.4 U6.5 47.915,15.001 v1(49.632,13.284) ; C15.1 48.522,5.225 ; v1(51.537,11.303) 51.537,8.56 51.054,8.077 50.089,8.077 ; U4.4@8.121,19.431 U4.4 ; U4.4@8.121,19.431 8.121,17.49 9.779,15.832 9.779,13.081 11.659,13.081 11.659,11.278 11.557,11.176 ; U4.4@8.121,19.431 16.84,19.431 16.891,19.38 17.272,19.38 17.551,19.101 17.551,15.443 17.094,14.986 ; 11.557,11.176 13.005,11.176 14.163,10.018 ; 14.163,10.018 14.163,10.566 15.408,11.811 17.069,11.811 17.884,10.996 17.884,8.329 19.736,6.477 23.19,6.477 25.024,8.311 ; 25.024,8.311 25.024,3.881 26.01,2.896 41.036,2.896 43.017,4.877 43.017,5.352 ; 32.034,27.305 32.591,27.861 34.889,27.861 C7.1 34.889,26.822 35.143,26.568 39.842,26.568 39.842,26.619 ; 39.141,13.208 39.37,12.979 ; 39.37,12.979 39.37,13.081 42.113,13.081 43.017,12.177 C3.1 43.017,5.352 ; 39.842,26.619 39.951,26.51 40.665,26.51 40.734,26.441 ; 40.734,26.441 49.65,26.441 50.895,25.197 ; 43.017,5.352 43.711,4.658 47.955,4.658 48.522,5.225 ; 48.522,5.225 48.768,4.978 53.645,4.978 54.508,5.842 54.508,10.969 57.018,13.479 58.939,13.479 59.278,13.818 59.278,28.86 J2.01 57.912,36.297 55.27,38.938 51.613,38.938 50.927,38.252 U7.7 ; 50.089,8.077 51.054,9.042 C13.1 51.054,18.44 51.784,19.17 R4.2 51.784,21.514 50.895,22.403 R3.2 50.895,25.197 ; 50.895,25.197 50.895,27.629 52.197,28.931 U7.3 52.197,33.147 50.927,34.417 U7.7
  Bottom Layer w0.254: v1(37.338,19.634) 39.116,21.412 v1(39.116,23.165) ; v1(49.632,13.284) 49.632,13.208 v1(51.537,11.303)
pads on no net: J1. J1.A8 J1.B8 U1.9 U1.10 U1.11 U1.12 U1.13 U1.14 U3.3 U3.4 U3.20 U3.21 U3.22 U3.25 U3.26 U3.27 U3.32 U3.33 U3.38 U3.39 U3.40 U3.41 U5.2 U6.3

## Polygon pours and split planes (outlines as drawn)
GND on Bottom Layer "GND_L02_P000" (solid, pour order 0): 0,0 59.944,0 59.944,40.005 0,40.005

## Silkscreen, mask and mechanical layers (free items; w line width, h text height)
Mechanical 1:
  the board outline again, w0.254

## Text inside footprints (layer, text, board x,y; h text height)
J1: Mechanical 13 "PCB EDGE" at 10.505,0.375 h0.5